# EAGLE board Raspberry_Pi_Control_Board (EAGLE 8.4.1)
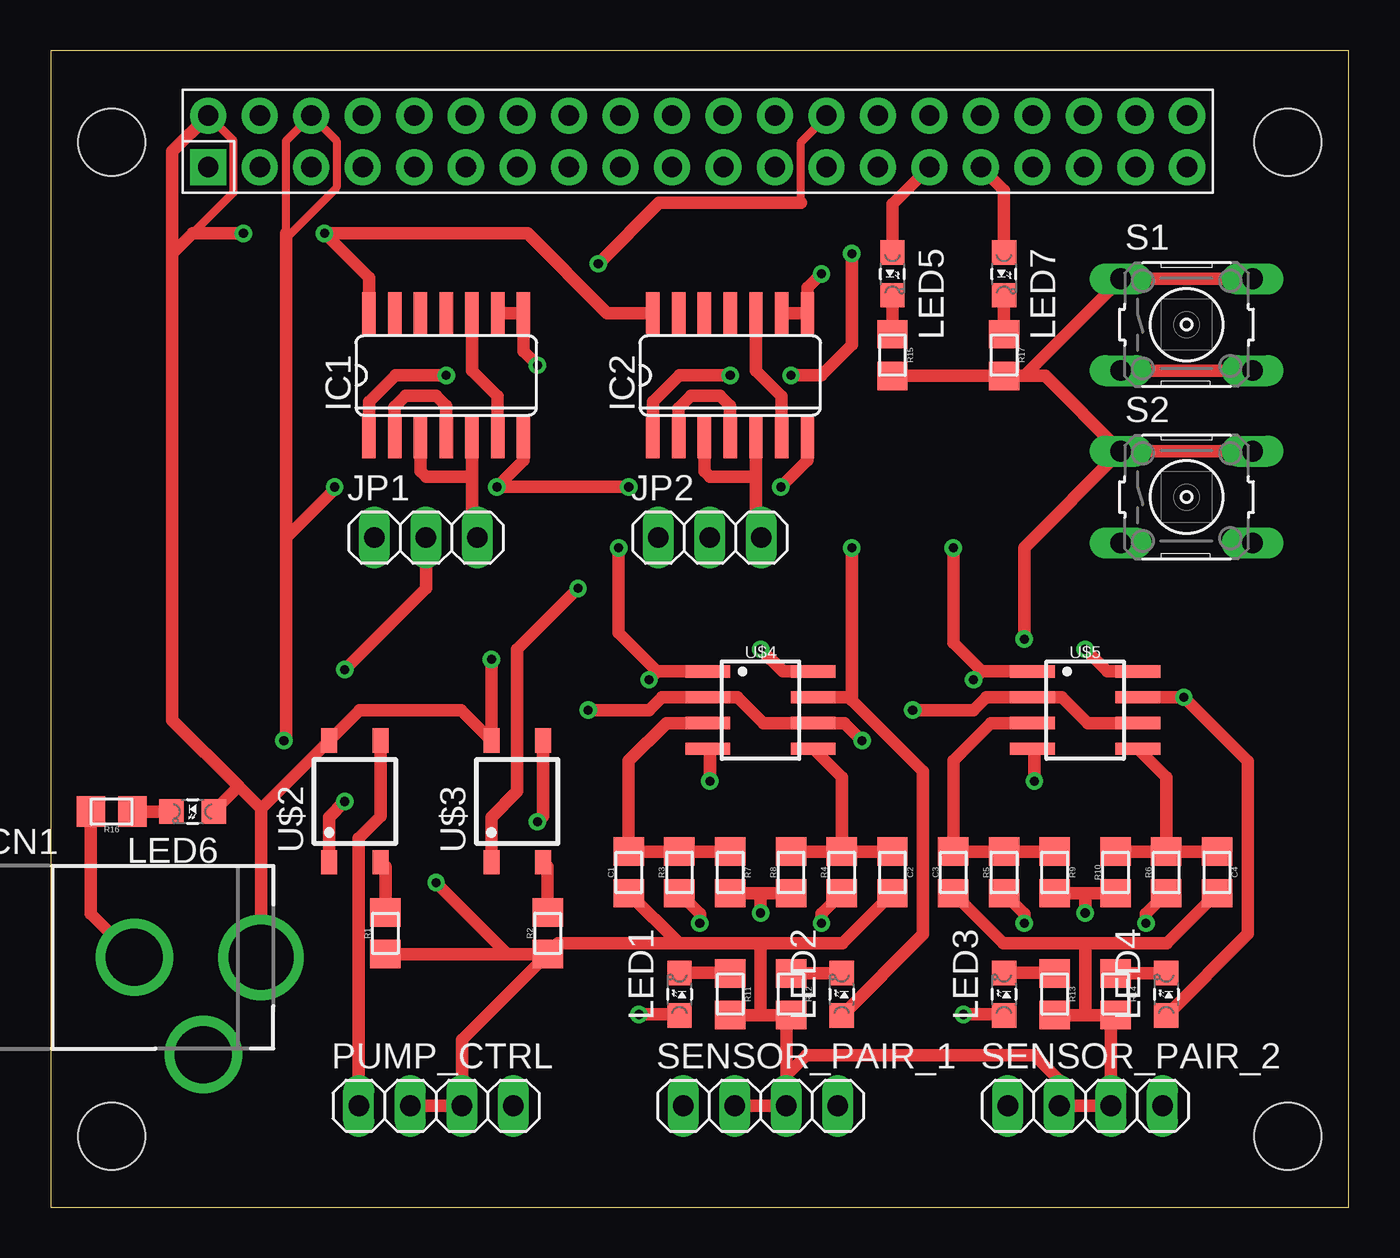
[diagram p0: board, top side]
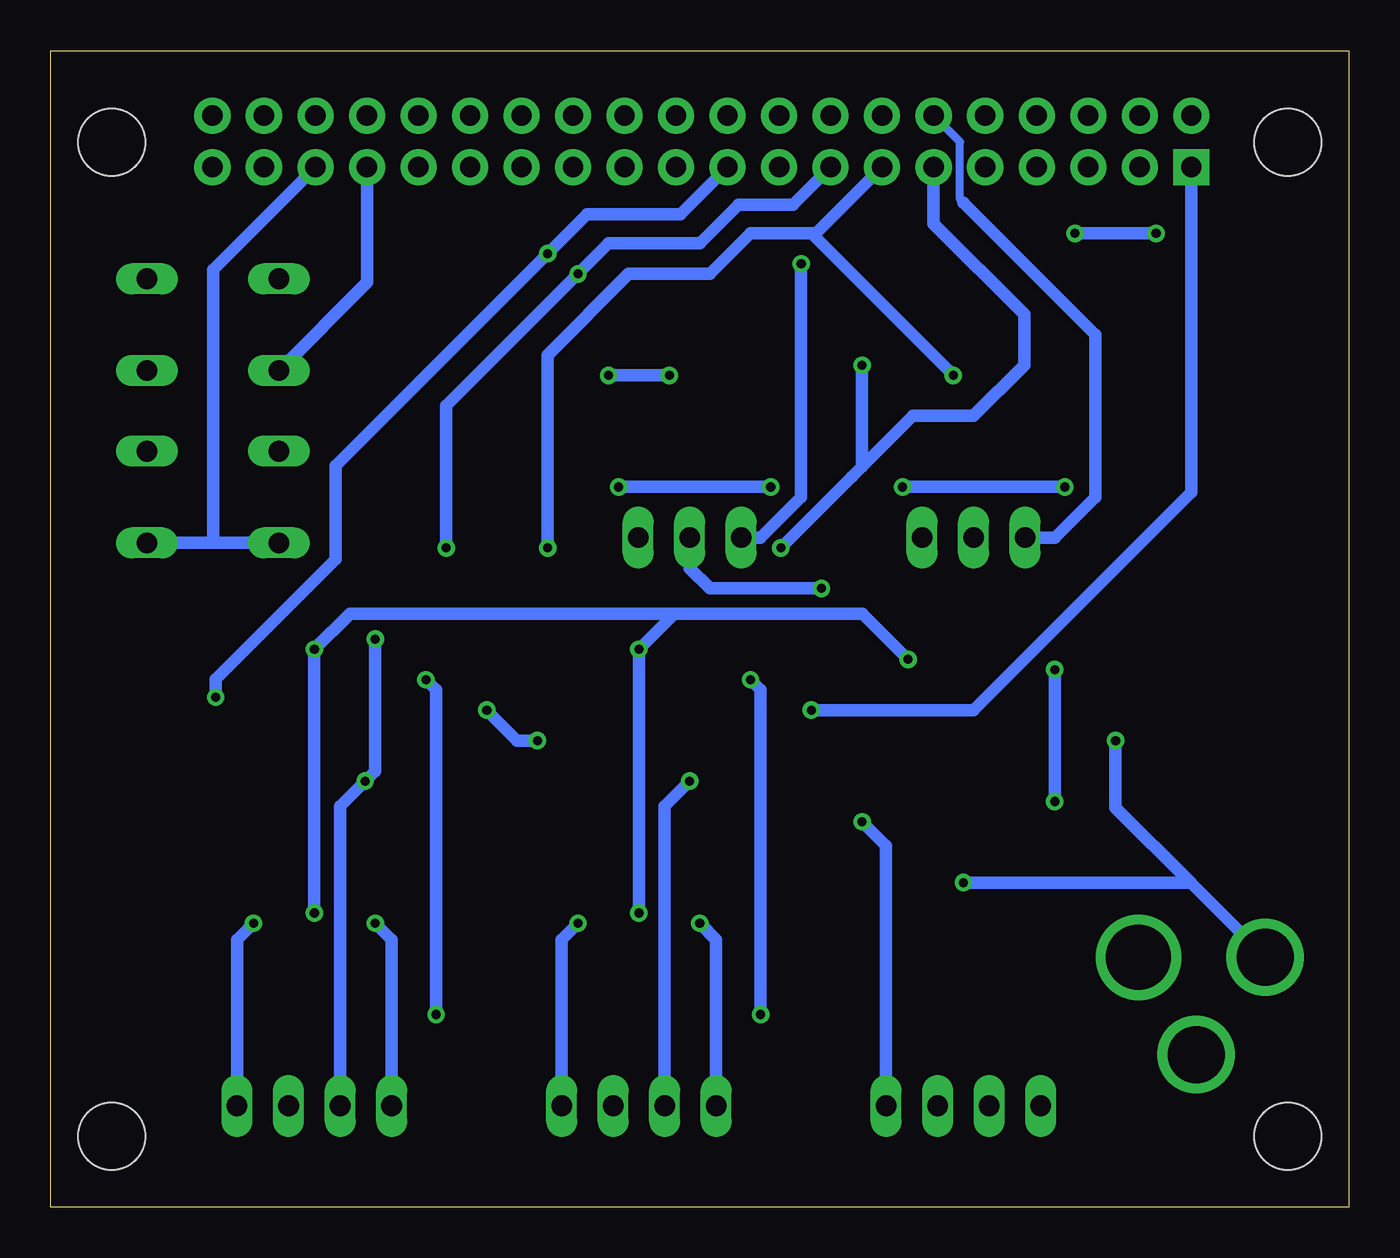
[diagram p1: board, bottom side, seen from below]

Size 64 x 57 mm. Coordinates in mm from the lower left corner, seen from the top.
Outline: 0,0 64,0 64,57 0,57 0,0
Copper layers (1*16): Top 0.035mm / dielectric 1.5mm / Bottom 0.035mm
Design rules "DRC Advanced Circuits": minimum track width 6mil, minimum drill 15mil, track to track 6mil, track to pad 6mil, pad to pad 6mil, via to via 6mil, smd to smd 6mil, copper to edge 40mil, drill to drill 6mil, minimum pad ring 10mil, minimum via ring 8mil, stop-mask expansion 4mil, vias tented up to drill 0mil, thermal gap 10mil
Holes 3.3 mm at 3,52.5 61,52.5 3,3.5 61,3.5

## Footprints (pad centres in the part's own frame; a part is rotated, then mirrored left to right if it is on the bottom)
0805 = smd 1.4 x 1.5: 1 -1.025,0; 2 1.025,0
DCJACK_2MM_PTH = drill 2.8: GND 0,7.35; GNDBREAK 4.8,10.75 | drill 3.2: PWR 0,13.6
SO14 = smd 0.66 x 2.032: 1 -3.81,-3.073; 2 -2.54,-3.073; 3 -1.27,-3.073; 4 0,-3.073; 5 1.27,-3.073; 6 2.54,-3.073; 7 3.81,-3.073; 8 3.81,3.073; 9 2.54,3.073; 10 1.27,3.073; 11 0,3.073; 12 -1.27,3.073; 13 -2.54,3.073; 14 -3.81,3.073
1X03 = drill 1.016 long: 1 -2.54,0; 2 0,0; 3 2.54,0
LED-805 = smd 1.2 x 1.2: A 0,-1.05; C 0,1.05
1X04 = drill 1.016 long: 1 -3.81,0; 2 -1.27,0; 3 1.27,0; 4 3.81,0
B3F-10XX = drill 1.016 long: 1 -3.251,2.261; 2 3.251,2.261; 3 -3.251,-2.261; 4 3.251,-2.261
RASPBERRY_PI_HEADER = drill 1 pad 1.778 square: 1 1.268,1.264 | drill 1 pad 1.778: 2 1.268,3.804; 3 3.808,1.264; 4 3.808,3.804; 5 6.348,1.264; 6 6.348,3.804; 7 8.888,1.264; 8 8.888,3.804; 9 11.428,1.264; 10 11.428,3.804; 11 13.968,1.264; 12 13.968,3.804; 13 16.508,1.264; 14 16.508,3.804; 15 19.048,1.264; 16 19.048,3.804; 17 21.588,1.264; 18 21.588,3.804; 19 24.128,1.264; 20 24.128,3.804; 21 26.668,1.264; 22 26.668,3.804; 23 29.208,1.264; 24 29.208,3.804; 25 31.748,1.264; 26 31.748,3.804; 27 34.288,1.264; 28 34.288,3.804; 29 36.828,1.264; 30 36.828,3.804; 31 39.368,1.264; 32 39.368,3.804; 33 41.908,1.264; 34 41.908,3.804; 35 44.448,1.264; 36 44.448,3.804; 37 46.988,1.264; 38 46.988,3.804; 39 49.528,1.264; 40 49.528,3.804
SOP04 = smd 0.8 x 1.2: 1 -1.27,-3; 2 1.27,-3; 3 1.27,3; 4 -1.27,3
SOIC-08 = smd 0.6 x 2.2: 1 -1.905,-2.6; 2 -0.635,-2.6; 3 0.635,-2.6; 4 1.905,-2.6; 5 1.905,2.6; 6 0.635,2.6; 7 -0.635,2.6; 8 -1.905,2.6

## Placement (x,y rotation side)
C1  1µ  [0805]  28.5,16.5 90 top
C2  1µ  [0805]  41.5,16.5 270 top
C3  1µ  [0805]  44.5,16.5 90 top
C4  1µ  [0805]  57.5,16.5 270 top
CN1  [DCJACK_2MM_PTH]  -3.23,12.32 270 top
IC1  4001D  [SO14]  19.5,41 0 top
IC2  4001D  [SO14]  33.5,41 0 top
JP1  [1X03]  18.5,33 0 top
JP2  [1X03]  32.5,33 0 top
LED1  RED  [LED-805]  31,10.5 0 top
LED2  BLUE  [LED-805]  39,10.5 0 top
LED3  GREEN  [LED-805]  47,10.5 0 top
LED4  ORANGE  [LED-805]  55,10.5 0 top
LED5  GREEN  [LED-805]  41.5,46 180 top
LED6  PURPLE  [LED-805]  7,19.5 90 top
LED7  RED  [LED-805]  47,46 180 top
PUMP_CTRL  [1X04]  19,5 0 top
R1  270  [0805]  16.5,13.5 90 top
R2  270  [0805]  24.5,13.5 90 top
R3  330  [0805]  31,16.5 90 top
R4  330  [0805]  39,16.5 90 top
R5  330  [0805]  47,16.5 90 top
R6  330  [0805]  55,16.5 90 top
R7  2M  [0805]  33.5,16.5 270 top
R8  2M  [0805]  36.5,16.5 90 top
R9  2M  [0805]  49.5,16.5 270 top
R10  2M  [0805]  52.5,16.5 90 top
R11  100  [0805]  33.5,10.5 270 top
R12  100  [0805]  36.5,10.5 270 top
R13  100  [0805]  49.5,10.5 270 top
R14  100  [0805]  52.5,10.5 270 top
R15  150  [0805]  41.5,42 270 top
R16  150  [0805]  3,19.5 180 top
R17  150  [0805]  47,42 270 top
S1  [B3F-10XX]  56,43.5 0 top
S2  [B3F-10XX]  56,35 0 top
SENSOR_PAIR_1  [1X04]  35,5 0 top
SENSOR_PAIR_2  [1X04]  51,5 0 top
U$1  RASPBERRY_PI_HEADER  [RASPBERRY_PI_HEADER]  6.5,50 0 top
U$2  CPC1002N  [SOP04]  15,20 0 top
U$3  CPC1002N  [SOP04]  23,20 0 top
U$4  MCP6002SOIC  [SOIC-08]  35,24.5 270 top
U$5  MCP6002SOIC  [SOIC-08]  51,24.5 270 top

## Library data of the parts
C1-C4 CN1 JP1 JP2 LED1-LED7 PUMP_CTRL R1-R17 SENSOR_PAIR_1 SENSOR_PAIR_2 U$1-U$5 = HyTechDevices
IC1 IC2 = 40xx
S1 S2 = HyTechDevices; MPN: B3F-1000; OC_FARNELL: 176432; OC_NEWARK: 36M3542

## Nets
!Q1: IC1.2 IC1.4
!Q2: IC2.2 IC2.4
+3V3: U$1.1 U$4.2 U$4.6 U$5.2 U$5.6
+5V: CN1.PWR IC1.14 IC2.14 LED6.A R7.2 R8.1 R9.2 R10.1 U$1.2 U$2.4 U$3.4 U$4.8 U$5.8
BUT1: S1.3 S1.4 U$1.33
BUT2: S2.3 S2.4 U$1.35
CHARGE1: C1.2 R3.2 R7.1 U$4.3
CHARGE2: C2.1 R4.2 R8.2 U$4.5
CHARGE3: C3.2 R5.2 R9.1 U$5.3
CHARGE4: C4.1 R6.2 R10.2 U$5.5
GND: C1.1 C2.2 C3.1 C4.2 CN1.GND IC1.7 IC2.7 PUMP_CTRL.2 PUMP_CTRL.3 R1.1 R2.1 R11.2 R12.2 R13.2 R14.2 R15.2 R16.2 R17.2 S1.1 S1.2 S2.1 S2.2 SENSOR_PAIR_1.2 SENSOR_PAIR_1.3 SENSOR_PAIR_2.2 SENSOR_PAIR_2.3 U$1.6 U$4.4 U$5.4
GNDBREAK: CN1.GNDBREAK
LED1: LED5.A U$1.29
LED2: LED7.A U$1.31
N$2: R1.2 U$2.2
N$4: R2.2 U$3.2
N$5: PUMP_CTRL.1 U$2.3
N$6: PUMP_CTRL.4 U$3.3
N$7: R5.1 SENSOR_PAIR_2.1
N$8: R6.1 SENSOR_PAIR_2.4
N$9: R4.1 SENSOR_PAIR_1.4
N$10: R3.1 SENSOR_PAIR_1.1
N$11: LED1.C R11.1
N$12: LED2.C R12.1
N$13: LED3.C R13.1
N$14: LED4.C R14.1
N$19: LED5.C R15.1
N$20: LED6.C R16.1
N$21: LED7.C R17.1
PI_PUMP_CTRL1: JP1.1 U$1.12
PI_PUMP_CTRL2: JP2.1 U$1.26
PUMP_CTRL1: JP1.2 U$2.1
PUMP_CTRL2: JP2.2 U$3.1
Q1: IC1.3 IC1.5 JP1.3
Q2: IC2.3 IC2.5 JP2.3
S1: IC1.8 IC1.9 LED1.A U$1.11 U$4.1
S2: IC1.1 LED2.A U$1.13 U$4.7
S3: IC2.8 IC2.9 LED3.A U$1.15 U$5.1
S4: IC2.1 LED4.A U$1.19 U$5.7
SET_P1_ON: IC1.6 IC1.10
SET_P2_ON: IC2.6 IC2.10

## Tracks (layer width: path | path; a pad name or v marks a point on that pad's centre or on a via)
!Q1
  Top 0.61: IC1.2 16.96,39.46 17.5,40 19,40 19.5,39.5 IC1.4
!Q2
  Top 0.61: IC2.4 33.5,39.5 33,40 31.58,40 30.96,39.38 IC2.2
+3V3  (via drill 0.45)
  Top 0.61: U$5.6 51.13,23.86 49.87,25.14 U$5.2 46.13,25.14 45.5,24.5 v42.5,24.5 | v26.5,24.5 29.5,24.5 30.14,25.14 U$4.2 33.87,25.14 35.13,23.86 U$4.6 39.13,23.86 v40,23
  Bottom 0.61: v42.5,24.5 41,23 v40,23 | v26.5,24.5 18.5,24.5 7.77,35.23 U$1.1
+5V  (via drill 0.45)
  Top 0.406: U$1.2 9.01,52.56 9.01,50.01 8.5,49.5 | 9,50 6,47
  Top 0.61: 10.37,19.64 U$2.4 15.23,24.5 20.23,24.5 U$3.4 v21.73,27 | 10.37,19.64 CN1.PWR | 51,15.47 R9.2 | 51,15.47 R10.1 | U$1.2 6,52.04 6,47 | 9.26,20.75 6,24.01 6,47 | 9.26,20.75 10.37,19.64 | v35,14.5 35,15.47 | U$4.8 36.09,26.41 v35,27.5 | v51,27.5 52.09,26.41 U$5.8 | v51,14.5 51,15.47 | R8.1 35,15.47 | 35,15.47 R7.2 | LED6.A 8.05,19.55 9.26,20.75 | v9.5,48 7,48 6,47 | IC1.14 15.69,45.81 v13.5,48 23.5,48 27.43,44.07 IC2.14
  Bottom 0.61: 33.25,29.25 v35,27.5 v35,14.5 | v51,14.5 v51,27.5 49.25,29.25 33.25,29.25 | v21.73,27 23.98,29.25 33.25,29.25 | v13.5,48 v9.5,48
BUT1
  Top 0.61: S1.3 S1.4
  Bottom 0.61: S1.3 48.41,45.58 U$1.33
BUT2
  Bottom 0.61: 56,32.74 S2.3 | 56,32.74 S2.4 | U$1.35 56,46.21 56,32.74
CHARGE1
  Top 0.61: R7.1 R3.2 C1.2 28.5,22 30.36,23.86 U$4.3
CHARGE2
  Top 0.61: R4.2 C2.1 | R4.2 R8.2 | U$4.5 39,21.2 R4.2
CHARGE3
  Top 0.61: R9.1 R5.2 C3.2 44.5,22 46.37,23.86 U$5.3
CHARGE4
  Top 0.61: R6.2 R10.2 | R6.2 C4.1 | U$5.5 55,21.2 R6.2
GND  (via drill 0.45)
  Top 0.406: U$1.6 14.09,52.56 14.09,50.25 11.6,47.76 11.6,48 11.6,52.56 U$1.6
  Top 0.61: 51,9.47 R14.2 52.27,9.24 SENSOR_PAIR_2.3 SENSOR_PAIR_2.2 49.73,6.27 48.5,7.5 37.27,7.5 36.27,6.5 | 51,9.47 R13.2 | 35,9.47 R12.2 36.27,9.24 36.27,6.5 | R11.2 35,9.47 | SENSOR_PAIR_1.2 SENSOR_PAIR_1.3 36.27,6.5 | 51,9.47 51,13 | 51,13 46.98,13 C3.1 | 51,13 55.02,13 C4.2 | 35,9.47 35,13 | 35,13 39.02,13 C2.2 | 35,13 30.98,13 | 30.98,13 C1.1 | 22.52,12.47 R1.1 | R2.1 22.52,12.47 | PUMP_CTRL.2 PUMP_CTRL.3 20.27,8.24 R2.1 | R2.1 25.02,13 30.98,13 | v19,16 22.52,12.47 | U$5.4 48.5,22.5 v48.5,21 | U$4.4 32.5,22.5 v32.5,21 | v11.5,23 11.6,23.1 11.6,33 | 11.6,33 11.6,48 | R15.2 R17.2 48,40.98 | S1.2 S1.1 52.75,45.72 48,40.98 | S2.1 S2.2 | S2.1 48,32.51 v48,28 | v14,35.5 14,35.4 11.6,33 | v28.5,35.5 v22,35.5 23.31,36.81 IC1.7 | v36,35.5 37.31,36.81 IC2.7 | 48,40.98 49.03,40.98 S2.1 | R16.2 1.98,14.46 CN1.GND
  Bottom 0.61: 7.8,16 CN1.GND | 7.8,16 v19,16 | SENSOR_PAIR_2.2 49.73,19.77 v48.5,21 48,21.5 v48,28 | v32.5,21 33.73,19.77 SENSOR_PAIR_1.2 | v11.5,23 11.5,19.7 7.8,16 | v28.5,35.5 v36,35.5 | v14,35.5 v22,35.5
LED1
  Top 0.61: LED5.A 41.5,49.44 U$1.29
LED2
  Top 0.61: LED7.A 47,50.13 U$1.31
N$2
  Top 0.61: U$2.2 16.5,16.77 R1.2
N$4
  Top 0.61: U$3.2 24.5,16.77 R2.2
N$5
  Top 0.61: PUMP_CTRL.1 15.19,18.19 16.27,19.27 U$2.3
N$6  (via drill 0.45)
  Top 0.61: U$3.3 24.27,19.27 v24,19
  Bottom 0.61: PUMP_CTRL.4 22.81,17.81 v24,19
N$7  (via drill 0.45)
  Top 0.61: v48,14 48,14.47 R5.1
  Bottom 0.61: SENSOR_PAIR_2.1 47.19,13.19 v48,14
N$8  (via drill 0.45)
  Top 0.61: v54,14 54,14.47 R6.1
  Bottom 0.61: v54,14 54.81,13.19 SENSOR_PAIR_2.4
N$9  (via drill 0.45)
  Top 0.61: R4.1 38,14.47 v38,14
  Bottom 0.61: v38,14 38.81,13.19 SENSOR_PAIR_1.4
N$10  (via drill 0.45)
  Top 0.61: v32,14 32,14.47 R3.1
  Bottom 0.61: SENSOR_PAIR_1.1 31.19,13.19 v32,14
N$11
  Top 0.61: LED1.C 33.48,11.55 R11.1
N$12
  Top 0.61: R12.1 38.98,11.53 LED2.C
N$13
  Top 0.61: LED3.C 49.48,11.55 R13.1
N$14
  Top 0.61: R14.1 54.98,11.53 LED4.C
N$19
  Top 0.61: LED5.C R15.1
N$20
  Top 0.61: LED6.C R16.1
N$21
  Top 0.61: LED7.C R17.1
PI_PUMP_CTRL1
  Bottom 0.406: U$1.12 19.17,52.51 19.17,49.67 19,49.5
  Bottom 0.61: JP1.1 14.5,33 12.5,35 12.5,43 19,49.5
PI_PUMP_CTRL2  (via drill 0.45)
  Top 0.406: 37,49.5 37,52.5 38.25,53.75 U$1.26
  Top 0.61: v27,46.5 30,49.5 37,49.5
  Bottom 0.61: JP2.1 29,33 27,35 v27,46.5
PUMP_CTRL1  (via drill 0.45)
  Top 0.61: JP1.2 18.5,30.5 v14.5,26.5 | U$2.1 13.73,19.23 v14.5,20
  Bottom 0.61: v14.5,26.5 v14.5,20
PUMP_CTRL2  (via drill 0.45)
  Top 0.61: U$3.1 21.73,19.23 23,20.5 23,27.5 v26,30.5
  Bottom 0.61: v26,30.5 31.5,30.5 32.5,31.5 JP2.2
Q1
  Top 0.61: JP1.3 20.77,33.27 20.77,36 | 20.77,36 IC1.5 | 20.77,36 18.5,36 18.23,36.27 IC1.3
Q2
  Top 0.61: JP2.3 34.77,33.27 34.77,36 | 34.77,36 IC2.5 | 34.77,36 32.5,36 32.23,36.27 IC2.3
S1  (via drill 0.45)
  Top 0.61: LED1.A 30.95,9.5 v29,9.5 | 29.91,26.41 v29.5,26 | 29.91,26.41 U$4.1 | v28,32.5 28,28.31 29.91,26.41 | v24,41.5 23.31,42.19 IC1.8 IC1.9
  Bottom 0.61: v29.5,26 29,25.5 v29,9.5 | 24.5,36 v28,32.5 | v24,41.5 24,36.5 24.5,36 | U$1.11 20.47,48.47 16,44 16,41.5 18.5,39 21.5,39 24.5,36
S2  (via drill 0.45)
  Top 0.61: LED2.A 43,13.45 43,21.5 39.5,25 | 39.5,25 39.37,25.14 U$4.7 | v39.5,32.5 39.5,25 | IC1.1 15.69,39.69 17,41 v19.5,41
  Bottom 0.61: U$1.13 26.27,48 26.5,48 | v39.5,32.5 39.5,42 35.5,46 31.5,46 29.5,48 26.5,48 | v19.5,41 26.5,48
S3  (via drill 0.45)
  Top 0.61: LED3.A 46.95,9.5 v45,9.5 | 45.91,26.41 v45.5,26 | 45.91,26.41 U$5.1 | v44.5,32.5 44.5,27.81 45.91,26.41 | v38,46 37.31,45.31 IC2.8 IC2.9
  Bottom 0.61: v45,9.5 45,25.5 v45.5,26 | U$1.15 27.41,49.41 30.09,49.41 32,47.5 36.5,47.5 v38,46 44.5,39.5 v44.5,32.5
S4  (via drill 0.45)
  Top 0.61: LED4.A 59.02,13.47 59.02,21.98 v55.87,25.14 U$5.7 | IC2.1 29.69,39.69 31,41 v33.5,41 | v36.5,41 38,41 39.5,42.5 v39.5,47
  Bottom 0.61: U$1.19 32.95,48.95 37.55,48.95 v39.5,47 49.95,36.55 49.95,31.95 55.87,26.03 v55.87,25.14 | v33.5,41 v36.5,41
SET_P1_ON
  Top 0.61: IC1.10 20.77,41.23 22.04,39.96 IC1.6
SET_P2_ON
  Top 0.61: IC2.10 34.77,41.23 36.04,39.96 IC2.6

## Text on the board
tDocu: Designed by Nathan Cheek | PI | HW | PI | HW | Pump CTRL | Sensor Pair 1 | Sensor Pair 2
bDocu: Raspberry Pi Pump Shield